# Altium PCB MJE13001_SWITCHING_NO_FEEDBACK.PcbDoc
Units mil, origin at the board's own origin, x right, y up, seen from the top; angles counter-clockwise.
Board outline 1975 x 950 mil, 2 copper layers (Top Layer, Bottom Layer); 19 components, 12 nets, 40 pads, 0 vias.
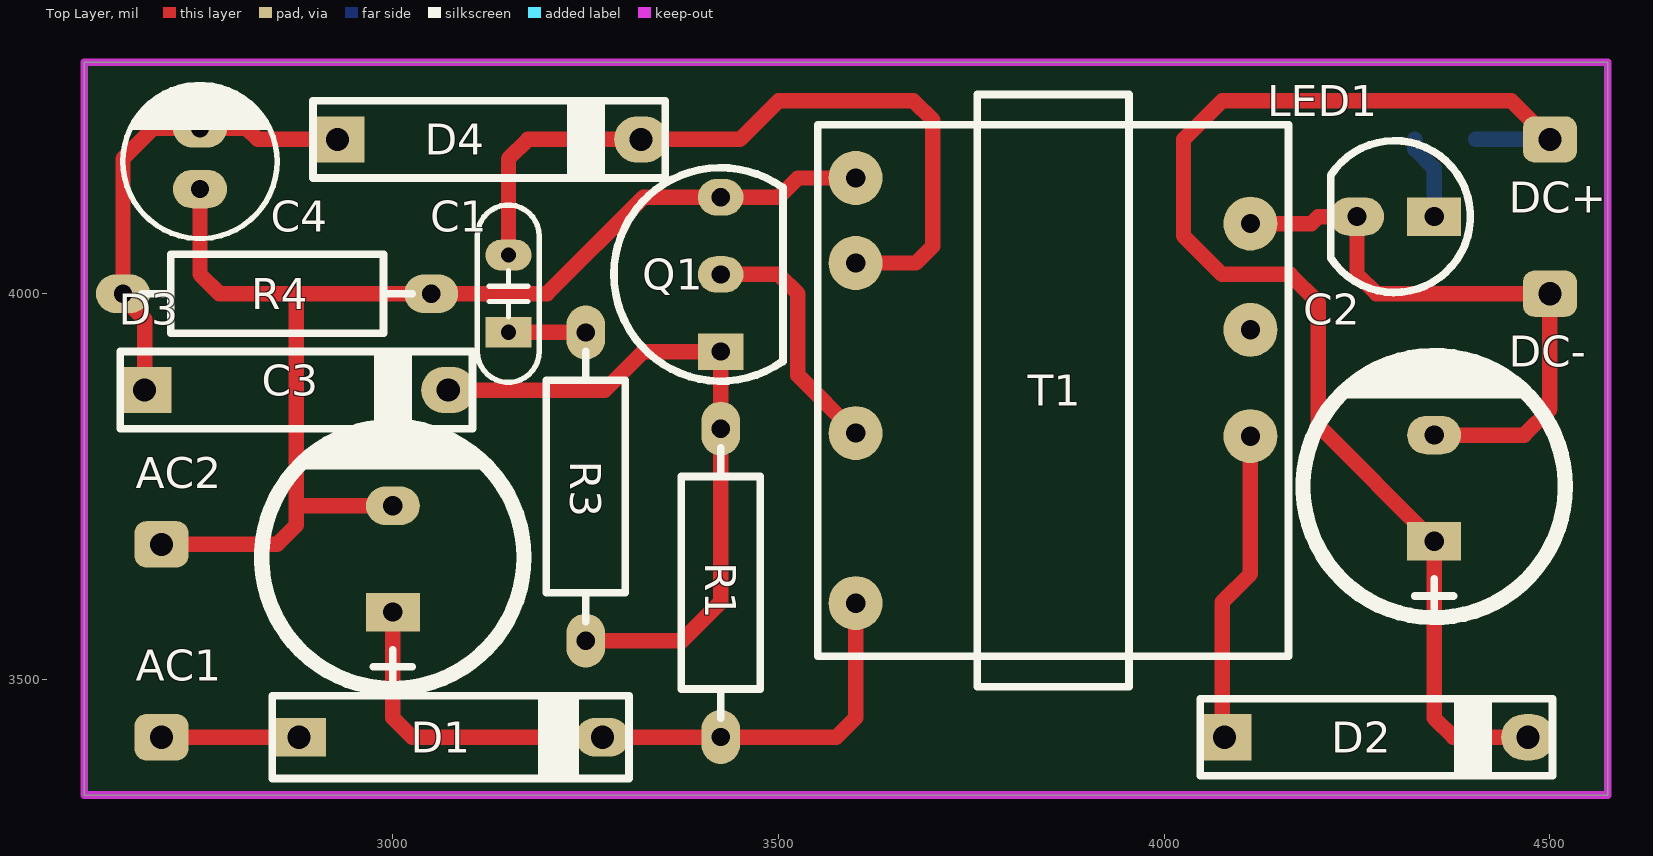
[diagram p0: Top Layer view]
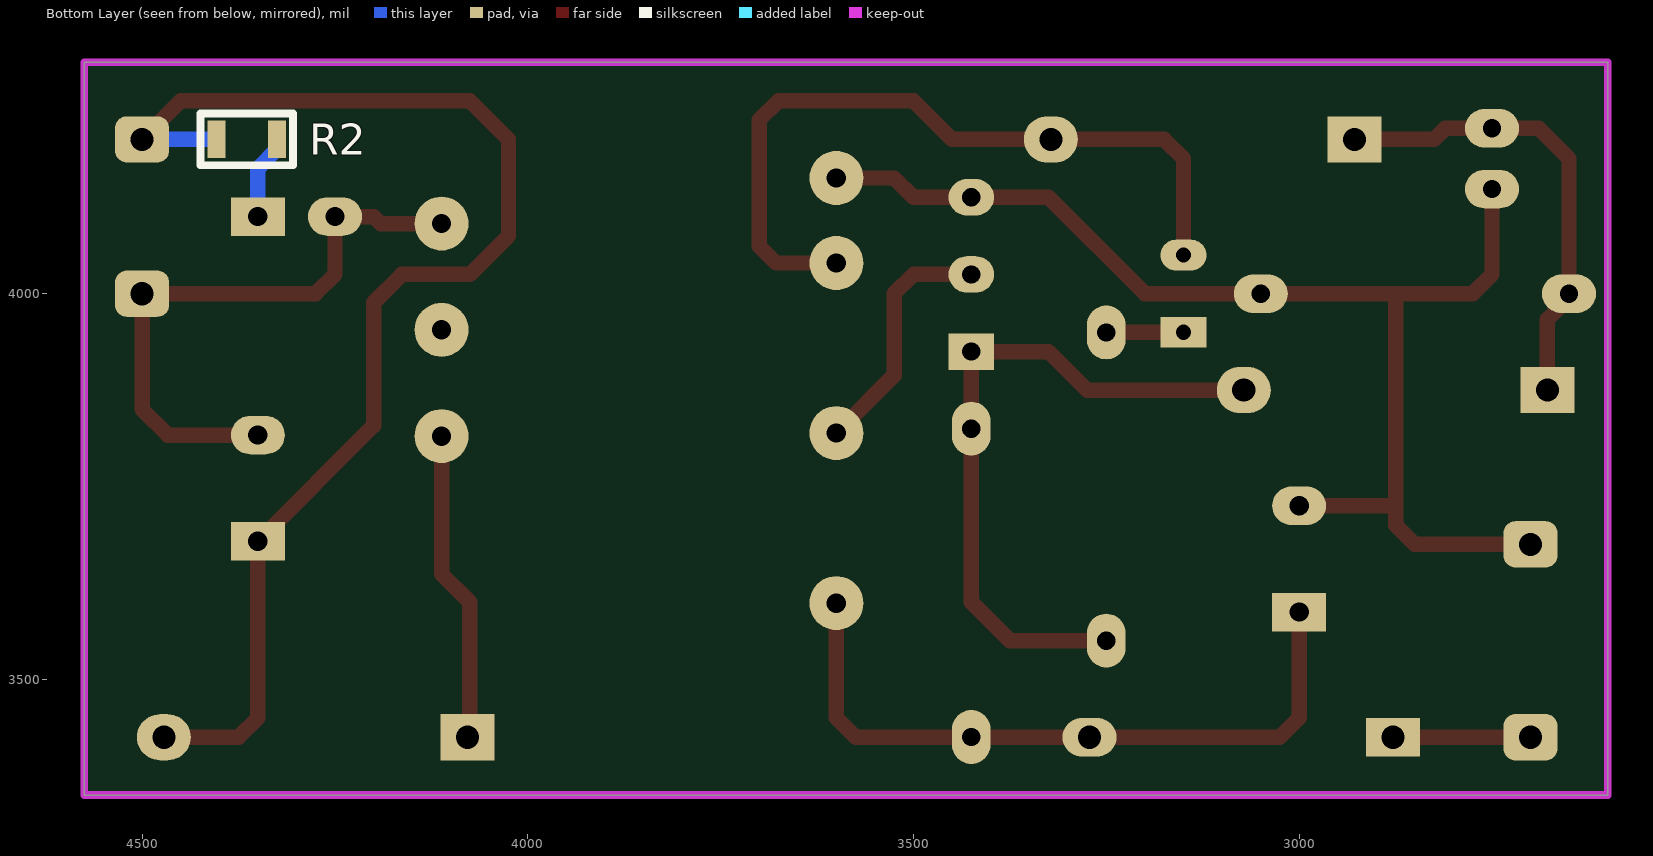
[diagram p1: Bottom Layer view, seen from below]
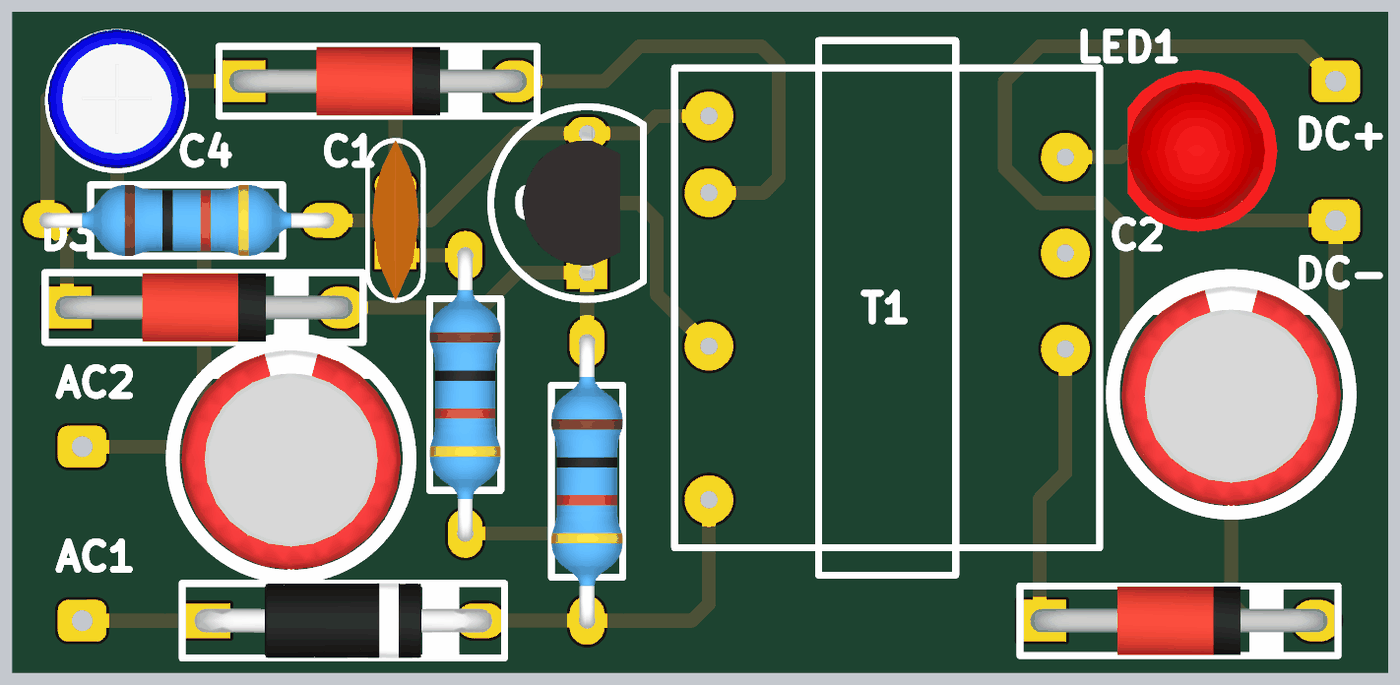
[diagram p2: 3D render of the assembled board from above, using the file's embedded part models]

## Layer stack, top to bottom
Top Solder: solder mask 0.4, Solder Resist, Dk 3.5
Top Layer: signal copper 1.4
Dielectric 1: dielectric 12.6, FR-4, Dk 4.8
Bottom Layer: signal copper 1.4
Bottom Solder: solder mask 0.4, Solder Resist, Dk 3.5

## Board outline
2600,3350 4575,3350 4575,4300 2600,4300

## Design rules (kind name [scope] priority, off if disabled: settings)
Clearance [All] p1: gap=10 ignorepadtopadclearanceinfootprint=FALSE except(0: Arc-Hole Track-Hole SMDPad-Hole THPad-Hole Via-Hole Fill-Hole Poly-Hole Region-Hole Text-Hole)
PolygonConnect [All] p1: connectstyle=Relief reliefconductorwidth=10 reliefentries=4 polygonreliefangle="90 Angle" airgapwidth=10
RoutingVias [All] p1: holewidth=28 width=50 viastyle="Through Hole" minholewidth=28 minwidth=50 maxholewidth=28 maxwidth=50
SolderMaskExpansion [All] p1: expansion=4 istentingtop=FALSE
Width [All] p1: maxlimit=30 minlimit=10 preferedwidth=20
30 further rules are at their usual default settings.

## Components (designator, comment, footprint, x,y, rotation, side; value= is the part's Value field where it differs from the comment)
AC1 "SolderPoint" SolderPoint 2700,3425 r0 top
AC2 "SolderPoint" SolderPoint 2700,3675 r0 top
C1 "471" CAP_DISC_PITCH_2.54MM 3150,4000 r90 top
C2 "1000uF/16V" CAP_RAD_7mm 4350,3750 r90 top
C3 "2.2uF/400V" CAP_RAD_7mm 3000,3658.27 r90 top
C4 "4.7uF" CAP_RAD_4mm 2750,4175 r90 top
D1 "1N4007" DO-41 3075,3425 r0 top
D2 "1N5819" "DO-35 Horizontal" 4275,3425 r0 top
D3 "5V1" "DO-35 Horizontal" 2875,3875 r0 top
D4 "1N4148" "DO-35 Horizontal" 3125,4200 r0 top
DC+ "SolderPoint" SolderPoint 4500,4200 r0 top
DC- "SolderPoint" SolderPoint 4500,4000 r0 top
LED1 "LED 5mm" LED_5MM 4300,4100 r180 top
Q1 "MJE13001" TO-92 3425,4025 r90 top
R1 "1M" RES-0.25W-H-MF 3425,3625.2 r270 top
R2 "10k" R0805 4403.74,4200 r0 bottom
R3 "100" RES-0.25W-H-MF 3250,3750 r270 top
R4 "6K8" RES-0.25W-H-MF 2850,4000 r0 top
T1 "Trans-EE19F" TRANS_EE19F 3855.91,3874.41 r90 top

## Footprints (in the part's own frame and the unit in brackets; to place one, negate y for a bottom-side part, rotate by r counter-clockwise, add the part's x,y. Pads: shape width x height; smd on the part's side, far side on the other; paste and mask are expansions set on the pad)
CAP_DISC_PITCH_2.54MM [mil]
  rect 40x60 hole 19.68: 1(-50,0)
  oval 40x60 hole 19.68: 2(50,0)
  silkscreen extent -115,-40 115,40, body extent -115,-33 115,33, height 235
CAP_RAD_4mm [mm]
  oval 1.27x1.778 hole 0.6: 1(-1,0) 2(1,0)
  silkscreen extent -2.63,-2.54 2.51,2.54, body extent -2.53,-2.53 2.52,2.53, height 7.29
CAP_RAD_7mm [mil]
  rect 50x70 hole 25: 1(-71.06,0)
  oval 50x70 hole 25: 2(66.73,0)
  silkscreen extent -170,-170 170,170, body extent -160,-157 155,157, height 446
"DO-35 Horizontal" [mil]
  rect 70x60 hole 30: 1(-196.85,0)
  oval 70x60 hole 30: 2(196.85,0)
  silkscreen extent -228,-50 228,50, body extent -214,-49 214,49, height 138
DO-41 [mil]
  rect 70x50 hole 30: 1(-196.85,0)
  oval 70x50 hole 30: 2(196.85,0)
  silkscreen extent -231,-54 231,54, body extent -214,-54 214,54, height 132
LED_5MM [mil]
  rect 70x50 hole 25: 1(-50,0)
  oval 70x50 hole 25: 2(50,0)
  silkscreen extent -97,-98 84,98, body extent -116,-116 98,116, height 339
R0805 [mm]
  rect 0.6x1.24 smd: 1(-2,0) 2(0,0)
  silkscreen extent -2.52,-0.85 0.53,0.85, body extent -2,-0.63 0,0.62, height 0.45
RES-0.25W-H-MF [mm]
  oval 1.778x1.27 hole 0.6: 1(-5.075,0) 2(5.075,0)
  silkscreen extent -4.45,-1.3 4.45,1.3, body extent -5.35,-1.3 5.36,1.3, height 2.69
SolderPoint [mil]
  rrect50% 70x60 hole 30: 1(0,0)
TO-92 [mm]
  rect 1.2x1.5 hole 0.6: 1(-2.54,0)
  oval 1.2x1.5 hole 0.6: 2(0,0) 3(2.54,0)
  silkscreen extent -3.51,-2.05 3.51,3.52, body extent -2.77,-1.21 2.77,2.35, height 7.58
TRANS_EE19F [mil]
  round 70 hole 25: 1(275.59,255.91) 2(165.35,255.91) 4(-55.12,255.91) 6(-275.59,255.91) 7(216.54,-255.91) 8(78.74,-255.91) 9(-59.06,-255.91)
  silkscreen extent -384,-305 384,305

## Part data
C1: library part Capacitors(Disc)
C2 C3 C4: library part Capacitor(Radian)
D2 D4: library part "Diode 1N4148"
D3: library part "Diode Zener"
Q1: library part MJE13001_Type_F
R1 R3 R4: library part "Resistors THD"
R2: library part "Resistor SMD"

## Nets (pads, with @x,y where several pads share a name; then routed paths per layer and width w, separated by ;. In a path a pad name is that pad's centre, name@x,y a point inside that pad or via, vN(x,y) a via of type N, cw(c..) or ccw(c..) an arc to the next point about the centre after c; other vN are vias at no path point)
NetAC1_1: AC1.1 D1.1 | length 178.1
  Top Layer w20: AC1.1 D1.1
NetAC2_1: AC2.1 C3.2 C4.1 Q1.3 R4.2 T1.1 | length 1643.5
  Top Layer w20: AC2.1 2850,3675 2875,3700 2875,3725 ; C4.1 2750,4025 2774.99,4000.01 2875,4000.01 ; C3.2 2875,3725 ; T1.1 3525,4150 3500,4125 Q1.3 3325,4125 3200,4000 R4.2 2875,4000.01 ; 2875,3725 2875,4000.01
NetC1_1: C1.1 R3.1 | length 100.1
  Top Layer w20: C1.1 3150.1,3949.9 3249.9,3949.9 R3.1
NetC1_2: C1.2 D4.2 T1.2 | length 988.8
  Top Layer w20: C1.2 3150,4175 3175,4200 D4.2 3450,4200 3500,4250 3675,4250 3700,4225 3700,4061.72 3678.05,4039.76 T1.2
NetC2_2: C2.2 DC-.1 LED1.2 T1.7 | length 791.1
  Top Layer w20: T1.7 4190.94,4090.94 4200,4100 LED1.2 4250,4025 4275,4000 DC-.1 4500,3850 4466.73,3816.73 C2.2
NetC3_1: C3.1 D1.2 R1.2 T1.6 | length 907.1
  Top Layer w20: C3.1 3000,3450 3025,3425 D1.2 3272.05,3425.2 3424.81,3425.2 R1.2 3425.4,3425 3575,3425 3600,3450 T1.6
NetC4_2: C4.2 D3.1 D4.1 R4.1 | length 611.9
  Top Layer w20: D3.1 2678.15,3966.81 2650.2,3994.76 R4.1 2650.2,4175.2 2689.37,4214.37 C4.2 2810.63,4214.37 2825,4200 D4.1
NetD2_1: D2.1 T1.9 | length 406.9
  Top Layer w20: D2.1 4075,3428.15 4075,3600 4111.81,3636.81 T1.9
NetD3_2: D3.2 Q1.1 R1.1 R3.2 | length 894.5
  Top Layer w20: D3.2 3275,3875 3325,3925 Q1.1 R1.1 3425,3600 3375.2,3550.2 R3.2
NetLED1_1: LED1.1 R2.1 | length 110.4
  Bottom Layer w20: R2.1 4325,4187.4 4350,4162.4 LED1.1
NetQ1_2: Q1.2 T1.4 | length 322.1
  Top Layer w20: Q1.2 3500,4025 3525,4000 3525,3894.29 T1.4
VCC: C2.1 D2.2 DC+.1 R2.2 | length 1681.2
  Top Layer w20: D2.2 4375,3425 4350,3450 C2.1 4200,3828.94 4200,3988.28 4163.28,4025 4075,4025 4025,4075 4025,4200 4075,4250 4450,4250 DC+.1
  Bottom Layer w20: R2.2 DC+.1
pads on no net: T1.8

## Keep-outs
Keep-Out Layer:
  the board outline again, w10